# EAGLE board 16x16_multiplexed_3.2x3.2_NSEW_headers (EAGLE 6.0)
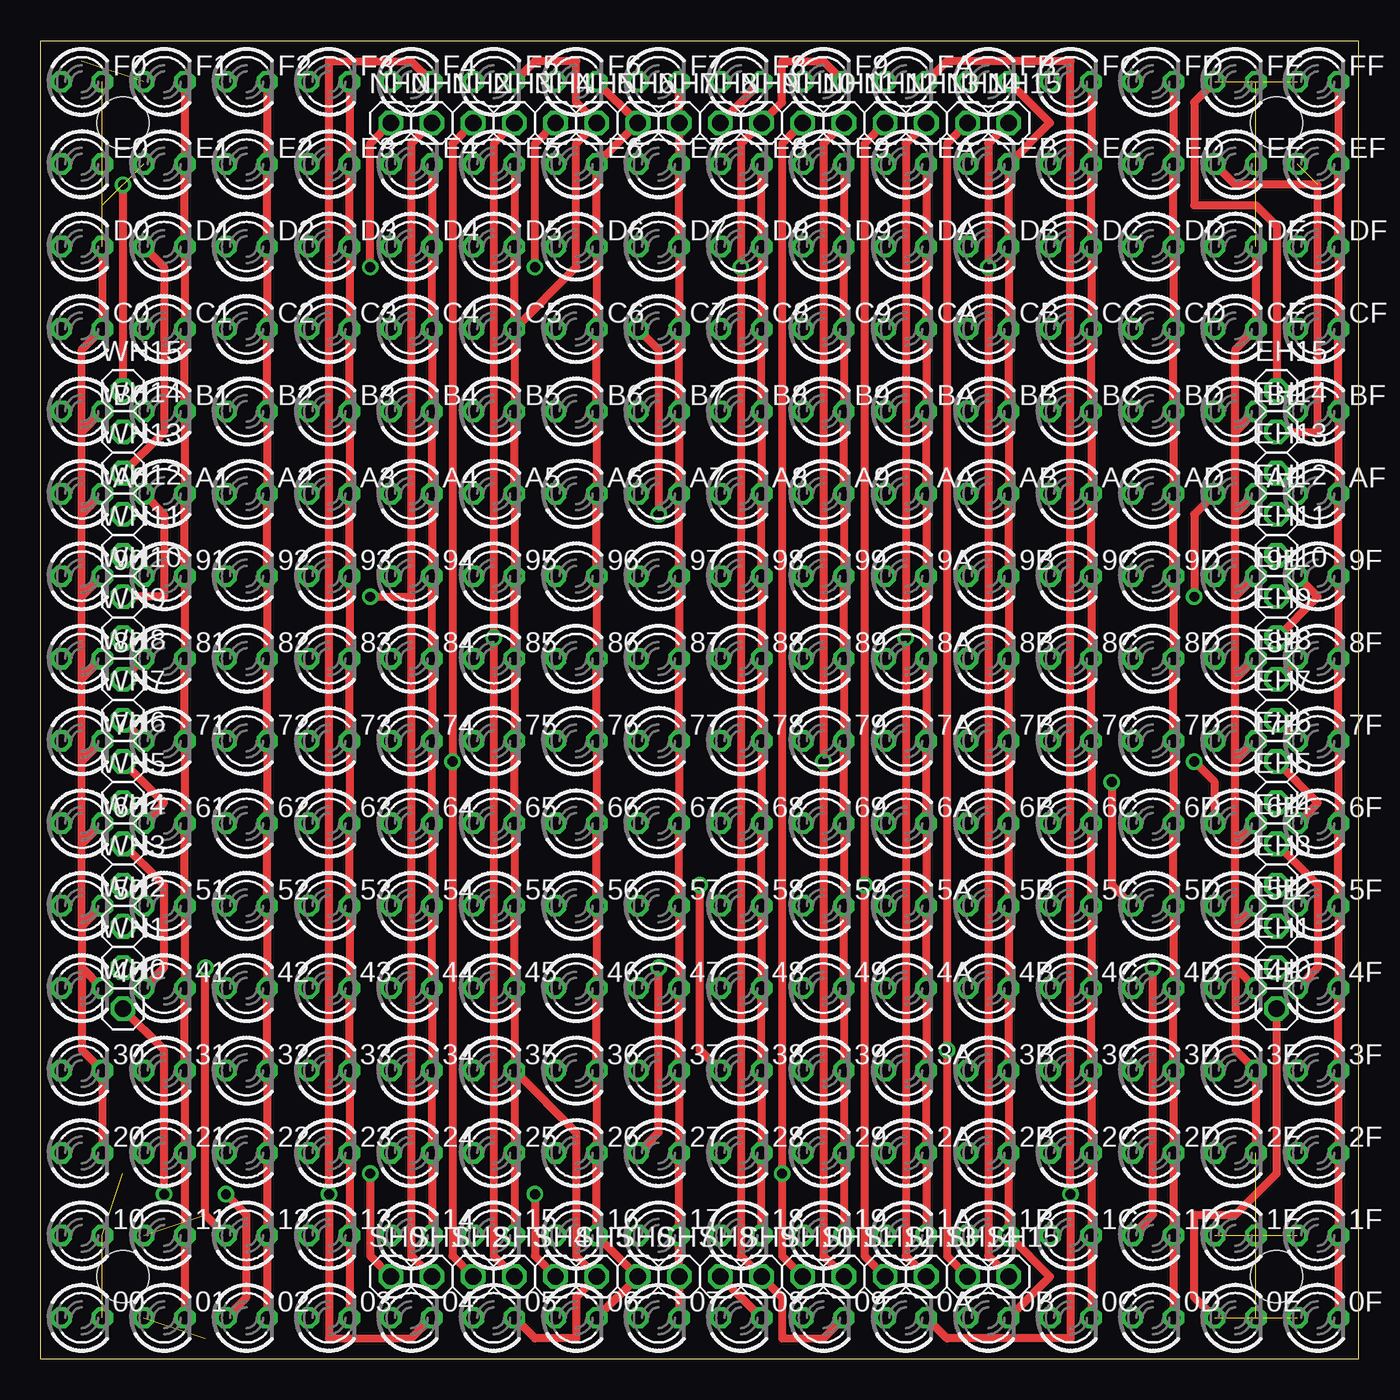
[diagram p0: board, top side]
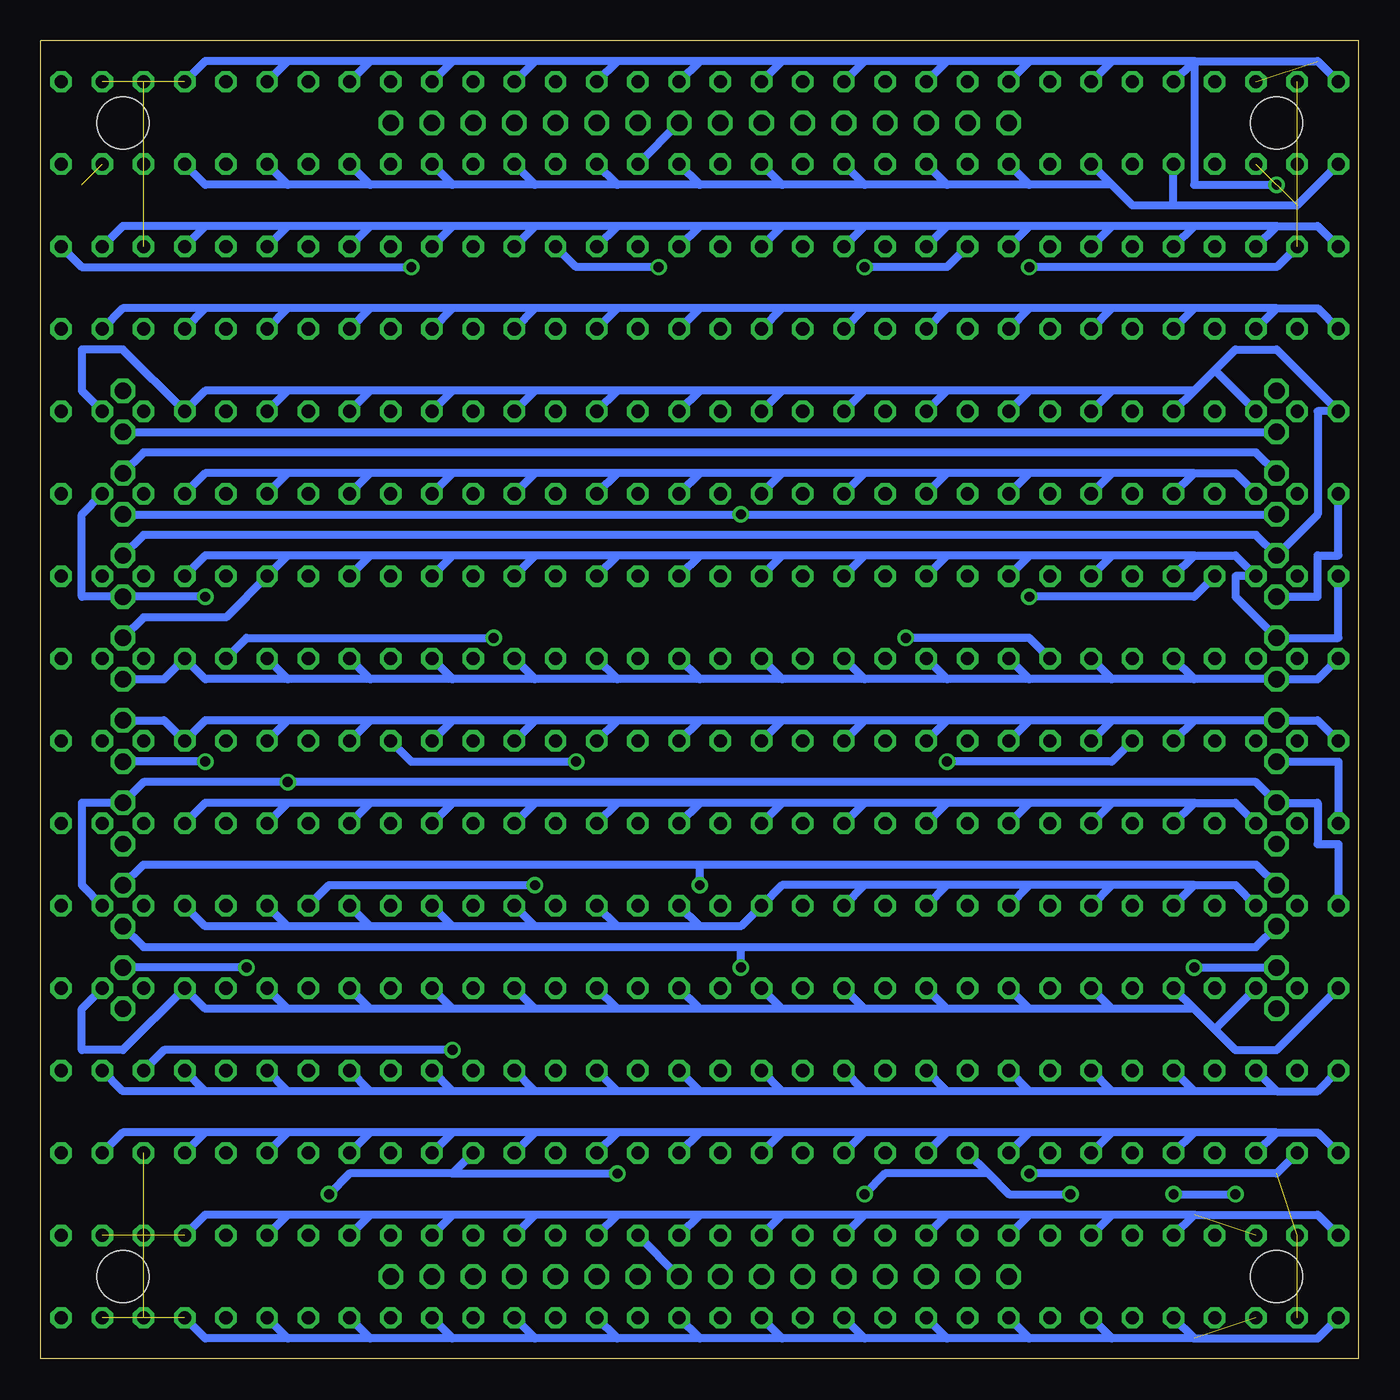
[diagram p1: board, bottom side, seen from below]

Size 81.28 x 81.28 mm. Coordinates in mm from the lower left corner, seen from the top.
Outline: 0,0 0,81.28 81.28,81.28 81.28,0 0,0
Copper layers (1*16): Top 0.035mm / dielectric 1.5mm / Bottom 0.035mm
Design rules: minimum track width 20mil, minimum drill 24mil, track to track 11mil, track to pad 11mil, pad to pad 8mil, via to via 8mil, smd to smd 8mil, copper to edge 40mil, drill to drill 8mil, minimum pad ring 10mil, minimum via ring 8mil, stop-mask expansion 4mil, vias tented up to drill 0mil, thermal gap 10mil
Holes 3.2 mm at 5.08,76.2 76.2,76.2 5.08,5.08 76.2,5.08

## Footprints (pad centres in the part's own frame; a part is rotated, then mirrored left to right if it is on the bottom)
LED3MM = drill 0.813 octagon: A -1.27,0; K 1.27,0
1X01 = drill 1.016 octagon: 1 0,0

## Placement (x,y rotation side)
00  [LED3MM]  2.54,2.54 0 top
0A  [LED3MM]  53.34,2.54 0 top
0B  [LED3MM]  58.42,2.54 0 top
0C  [LED3MM]  63.5,2.54 0 top
0D  [LED3MM]  68.58,2.54 0 top
0E  [LED3MM]  73.66,2.54 0 top
0F  [LED3MM]  78.74,2.54 0 top
01  [LED3MM]  7.62,2.54 0 top
1A  [LED3MM]  53.34,7.62 0 top
1B  [LED3MM]  58.42,7.62 0 top
1C  [LED3MM]  63.5,7.62 0 top
1D  [LED3MM]  68.58,7.62 0 top
1E  [LED3MM]  73.66,7.62 0 top
1F  [LED3MM]  78.74,7.62 0 top
02  [LED3MM]  12.7,2.54 0 top
2A  [LED3MM]  53.34,12.7 0 top
2B  [LED3MM]  58.42,12.7 0 top
2C  [LED3MM]  63.5,12.7 0 top
2D  [LED3MM]  68.58,12.7 0 top
2E  [LED3MM]  73.66,12.7 0 top
2F  [LED3MM]  78.74,12.7 0 top
03  [LED3MM]  17.78,2.54 0 top
3A  [LED3MM]  53.34,17.78 0 top
3B  [LED3MM]  58.42,17.78 0 top
3C  [LED3MM]  63.5,17.78 0 top
3D  [LED3MM]  68.58,17.78 0 top
3E  [LED3MM]  73.66,17.78 0 top
3F  [LED3MM]  78.74,17.78 0 top
04  [LED3MM]  22.86,2.54 0 top
4A  [LED3MM]  53.34,22.86 0 top
4B  [LED3MM]  58.42,22.86 0 top
4C  [LED3MM]  63.5,22.86 0 top
4D  [LED3MM]  68.58,22.86 0 top
4E  [LED3MM]  73.66,22.86 0 top
4F  [LED3MM]  78.74,22.86 0 top
05  [LED3MM]  27.94,2.54 0 top
5A  [LED3MM]  53.34,27.94 0 top
5B  [LED3MM]  58.42,27.94 0 top
5C  [LED3MM]  63.5,27.94 0 top
5D  [LED3MM]  68.58,27.94 0 top
5E  [LED3MM]  73.66,27.94 0 top
5F  [LED3MM]  78.74,27.94 0 top
06  [LED3MM]  33.02,2.54 0 top
6A  [LED3MM]  53.34,33.02 0 top
6B  [LED3MM]  58.42,33.02 0 top
6C  [LED3MM]  63.5,33.02 0 top
6D  [LED3MM]  68.58,33.02 0 top
6E  [LED3MM]  73.66,33.02 0 top
6F  [LED3MM]  78.74,33.02 0 top
07  [LED3MM]  38.1,2.54 0 top
7A  [LED3MM]  53.34,38.1 0 top
7B  [LED3MM]  58.42,38.1 0 top
7C  [LED3MM]  63.5,38.1 0 top
7D  [LED3MM]  68.58,38.1 0 top
7E  [LED3MM]  73.66,38.1 0 top
7F  [LED3MM]  78.74,38.1 0 top
08  [LED3MM]  43.18,2.54 0 top
8A  [LED3MM]  53.34,43.18 0 top
8B  [LED3MM]  58.42,43.18 0 top
8C  [LED3MM]  63.5,43.18 0 top
8D  [LED3MM]  68.58,43.18 0 top
8E  [LED3MM]  73.66,43.18 0 top
8F  [LED3MM]  78.74,43.18 0 top
09  [LED3MM]  48.26,2.54 0 top
9A  [LED3MM]  53.34,48.26 0 top
9B  [LED3MM]  58.42,48.26 0 top
9C  [LED3MM]  63.5,48.26 0 top
9D  [LED3MM]  68.58,48.26 0 top
9E  [LED3MM]  73.66,48.26 0 top
9F  [LED3MM]  78.74,48.26 0 top
10  [LED3MM]  2.54,7.62 0 top
11  [LED3MM]  7.62,7.62 0 top
12  [LED3MM]  12.7,7.62 0 top
13  [LED3MM]  17.78,7.62 0 top
14  [LED3MM]  22.86,7.62 0 top
15  [LED3MM]  27.94,7.62 0 top
16  [LED3MM]  33.02,7.62 0 top
17  [LED3MM]  38.1,7.62 0 top
18  [LED3MM]  43.18,7.62 0 top
19  [LED3MM]  48.26,7.62 0 top
20  [LED3MM]  2.54,12.7 0 top
21  [LED3MM]  7.62,12.7 0 top
22  [LED3MM]  12.7,12.7 0 top
23  [LED3MM]  17.78,12.7 0 top
24  [LED3MM]  22.86,12.7 0 top
25  [LED3MM]  27.94,12.7 0 top
26  [LED3MM]  33.02,12.7 0 top
27  [LED3MM]  38.1,12.7 0 top
28  [LED3MM]  43.18,12.7 0 top
29  [LED3MM]  48.26,12.7 0 top
30  [LED3MM]  2.54,17.78 0 top
31  [LED3MM]  7.62,17.78 0 top
32  [LED3MM]  12.7,17.78 0 top
33  [LED3MM]  17.78,17.78 0 top
34  [LED3MM]  22.86,17.78 0 top
35  [LED3MM]  27.94,17.78 0 top
36  [LED3MM]  33.02,17.78 0 top
37  [LED3MM]  38.1,17.78 0 top
38  [LED3MM]  43.18,17.78 0 top
39  [LED3MM]  48.26,17.78 0 top
40  [LED3MM]  2.54,22.86 0 top
41  [LED3MM]  7.62,22.86 0 top
42  [LED3MM]  12.7,22.86 0 top
43  [LED3MM]  17.78,22.86 0 top
44  [LED3MM]  22.86,22.86 0 top
45  [LED3MM]  27.94,22.86 0 top
46  [LED3MM]  33.02,22.86 0 top
47  [LED3MM]  38.1,22.86 0 top
48  [LED3MM]  43.18,22.86 0 top
49  [LED3MM]  48.26,22.86 0 top
50  [LED3MM]  2.54,27.94 0 top
51  [LED3MM]  7.62,27.94 0 top
52  [LED3MM]  12.7,27.94 0 top
53  [LED3MM]  17.78,27.94 0 top
54  [LED3MM]  22.86,27.94 0 top
55  [LED3MM]  27.94,27.94 0 top
56  [LED3MM]  33.02,27.94 0 top
57  [LED3MM]  38.1,27.94 0 top
58  [LED3MM]  43.18,27.94 0 top
59  [LED3MM]  48.26,27.94 0 top
60  [LED3MM]  2.54,33.02 0 top
61  [LED3MM]  7.62,33.02 0 top
62  [LED3MM]  12.7,33.02 0 top
63  [LED3MM]  17.78,33.02 0 top
64  [LED3MM]  22.86,33.02 0 top
65  [LED3MM]  27.94,33.02 0 top
66  [LED3MM]  33.02,33.02 0 top
67  [LED3MM]  38.1,33.02 0 top
68  [LED3MM]  43.18,33.02 0 top
69  [LED3MM]  48.26,33.02 0 top
70  [LED3MM]  2.54,38.1 0 top
71  [LED3MM]  7.62,38.1 0 top
72  [LED3MM]  12.7,38.1 0 top
73  [LED3MM]  17.78,38.1 0 top
74  [LED3MM]  22.86,38.1 0 top
75  [LED3MM]  27.94,38.1 0 top
76  [LED3MM]  33.02,38.1 0 top
77  [LED3MM]  38.1,38.1 0 top
78  [LED3MM]  43.18,38.1 0 top
79  [LED3MM]  48.26,38.1 0 top
80  [LED3MM]  2.54,43.18 0 top
81  [LED3MM]  7.62,43.18 0 top
82  [LED3MM]  12.7,43.18 0 top
83  [LED3MM]  17.78,43.18 0 top
84  [LED3MM]  22.86,43.18 0 top
85  [LED3MM]  27.94,43.18 0 top
86  [LED3MM]  33.02,43.18 0 top
87  [LED3MM]  38.1,43.18 0 top
88  [LED3MM]  43.18,43.18 0 top
89  [LED3MM]  48.26,43.18 0 top
90  [LED3MM]  2.54,48.26 0 top
91  [LED3MM]  7.62,48.26 0 top
92  [LED3MM]  12.7,48.26 0 top
93  [LED3MM]  17.78,48.26 0 top
94  [LED3MM]  22.86,48.26 0 top
95  [LED3MM]  27.94,48.26 0 top
96  [LED3MM]  33.02,48.26 0 top
97  [LED3MM]  38.1,48.26 0 top
98  [LED3MM]  43.18,48.26 0 top
99  [LED3MM]  48.26,48.26 0 top
A0  [LED3MM]  2.54,53.34 0 top
A1  [LED3MM]  7.62,53.34 0 top
A2  [LED3MM]  12.7,53.34 0 top
A3  [LED3MM]  17.78,53.34 0 top
A4  [LED3MM]  22.86,53.34 0 top
A5  [LED3MM]  27.94,53.34 0 top
A6  [LED3MM]  33.02,53.34 0 top
A7  [LED3MM]  38.1,53.34 0 top
A8  [LED3MM]  43.18,53.34 0 top
A9  [LED3MM]  48.26,53.34 0 top
AA  [LED3MM]  53.34,53.34 0 top
AB  [LED3MM]  58.42,53.34 0 top
AC  [LED3MM]  63.5,53.34 0 top
AD  [LED3MM]  68.58,53.34 0 top
AE  [LED3MM]  73.66,53.34 0 top
AF  [LED3MM]  78.74,53.34 0 top
B0  [LED3MM]  2.54,58.42 0 top
B1  [LED3MM]  7.62,58.42 0 top
B2  [LED3MM]  12.7,58.42 0 top
B3  [LED3MM]  17.78,58.42 0 top
B4  [LED3MM]  22.86,58.42 0 top
B5  [LED3MM]  27.94,58.42 0 top
B6  [LED3MM]  33.02,58.42 0 top
B7  [LED3MM]  38.1,58.42 0 top
B8  [LED3MM]  43.18,58.42 0 top
B9  [LED3MM]  48.26,58.42 0 top
BA  [LED3MM]  53.34,58.42 0 top
BB  [LED3MM]  58.42,58.42 0 top
BC  [LED3MM]  63.5,58.42 0 top
BD  [LED3MM]  68.58,58.42 0 top
BE  [LED3MM]  73.66,58.42 0 top
BF  [LED3MM]  78.74,58.42 0 top
C0  [LED3MM]  2.54,63.5 0 top
C1  [LED3MM]  7.62,63.5 0 top
C2  [LED3MM]  12.7,63.5 0 top
C3  [LED3MM]  17.78,63.5 0 top
C4  [LED3MM]  22.86,63.5 0 top
C5  [LED3MM]  27.94,63.5 0 top
C6  [LED3MM]  33.02,63.5 0 top
C7  [LED3MM]  38.1,63.5 0 top
C8  [LED3MM]  43.18,63.5 0 top
C9  [LED3MM]  48.26,63.5 0 top
CA  [LED3MM]  53.34,63.5 0 top
CB  [LED3MM]  58.42,63.5 0 top
CC  [LED3MM]  63.5,63.5 0 top
CD  [LED3MM]  68.58,63.5 0 top
CE  [LED3MM]  73.66,63.5 0 top
CF  [LED3MM]  78.74,63.5 0 top
D0  [LED3MM]  2.54,68.58 0 top
D1  [LED3MM]  7.62,68.58 0 top
D2  [LED3MM]  12.7,68.58 0 top
D3  [LED3MM]  17.78,68.58 0 top
D4  [LED3MM]  22.86,68.58 0 top
D5  [LED3MM]  27.94,68.58 0 top
D6  [LED3MM]  33.02,68.58 0 top
D7  [LED3MM]  38.1,68.58 0 top
D8  [LED3MM]  43.18,68.58 0 top
D9  [LED3MM]  48.26,68.58 0 top
DA  [LED3MM]  53.34,68.58 0 top
DB  [LED3MM]  58.42,68.58 0 top
DC  [LED3MM]  63.5,68.58 0 top
DD  [LED3MM]  68.58,68.58 0 top
DE  [LED3MM]  73.66,68.58 0 top
DF  [LED3MM]  78.74,68.58 0 top
E0  [LED3MM]  2.54,73.66 0 top
E1  [LED3MM]  7.62,73.66 0 top
E2  [LED3MM]  12.7,73.66 0 top
E3  [LED3MM]  17.78,73.66 0 top
E4  [LED3MM]  22.86,73.66 0 top
E5  [LED3MM]  27.94,73.66 0 top
E6  [LED3MM]  33.02,73.66 0 top
E7  [LED3MM]  38.1,73.66 0 top
E8  [LED3MM]  43.18,73.66 0 top
E9  [LED3MM]  48.26,73.66 0 top
EA  [LED3MM]  53.34,73.66 0 top
EB  [LED3MM]  58.42,73.66 0 top
EC  [LED3MM]  63.5,73.66 0 top
ED  [LED3MM]  68.58,73.66 0 top
EE  [LED3MM]  73.66,73.66 0 top
EF  [LED3MM]  78.74,73.66 0 top
EH0  [1X01]  76.2,21.59 0 top
EH1  [1X01]  76.2,24.13 0 top
EH2  [1X01]  76.2,26.67 0 top
EH3  [1X01]  76.2,29.21 0 top
EH4  [1X01]  76.2,31.75 0 top
EH5  [1X01]  76.2,34.29 0 top
EH6  [1X01]  76.2,36.83 0 top
EH7  [1X01]  76.2,39.37 0 top
EH8  [1X01]  76.2,41.91 0 top
EH9  [1X01]  76.2,44.45 0 top
EH10  [1X01]  76.2,46.99 0 top
EH11  [1X01]  76.2,49.53 0 top
EH12  [1X01]  76.2,52.07 0 top
EH13  [1X01]  76.2,54.61 0 top
EH14  [1X01]  76.2,57.15 0 top
EH15  [1X01]  76.2,59.69 0 top
F0  [LED3MM]  2.54,78.74 0 top
F1  [LED3MM]  7.62,78.74 0 top
F2  [LED3MM]  12.7,78.74 0 top
F3  [LED3MM]  17.78,78.74 0 top
F4  [LED3MM]  22.86,78.74 0 top
F5  [LED3MM]  27.94,78.74 0 top
F6  [LED3MM]  33.02,78.74 0 top
F7  [LED3MM]  38.1,78.74 0 top
F8  [LED3MM]  43.18,78.74 0 top
F9  [LED3MM]  48.26,78.74 0 top
FA  [LED3MM]  53.34,78.74 0 top
FB  [LED3MM]  58.42,78.74 0 top
FC  [LED3MM]  63.5,78.74 0 top
FD  [LED3MM]  68.58,78.74 0 top
FE  [LED3MM]  73.66,78.74 0 top
FF  [LED3MM]  78.74,78.74 0 top
NH0  [1X01]  21.59,76.2 0 top
NH1  [1X01]  24.13,76.2 0 top
NH2  [1X01]  26.67,76.2 0 top
NH3  [1X01]  29.21,76.2 0 top
NH4  [1X01]  31.75,76.2 0 top
NH5  [1X01]  34.29,76.2 0 top
NH6  [1X01]  36.83,76.2 0 top
NH7  [1X01]  39.37,76.2 0 top
NH8  [1X01]  41.91,76.2 0 top
NH9  [1X01]  44.45,76.2 0 top
NH10  [1X01]  46.99,76.2 0 top
NH11  [1X01]  49.53,76.2 0 top
NH12  [1X01]  52.07,76.2 0 top
NH13  [1X01]  54.61,76.2 0 top
NH14  [1X01]  57.15,76.2 0 top
NH15  [1X01]  59.69,76.2 0 top
SH0  [1X01]  21.59,5.08 0 top
SH1  [1X01]  24.13,5.08 0 top
SH2  [1X01]  26.67,5.08 0 top
SH3  [1X01]  29.21,5.08 0 top
SH4  [1X01]  31.75,5.08 0 top
SH5  [1X01]  34.29,5.08 0 top
SH6  [1X01]  36.83,5.08 0 top
SH7  [1X01]  39.37,5.08 0 top
SH8  [1X01]  41.91,5.08 0 top
SH9  [1X01]  44.45,5.08 0 top
SH10  [1X01]  46.99,5.08 0 top
SH11  [1X01]  49.53,5.08 0 top
SH12  [1X01]  52.07,5.08 0 top
SH13  [1X01]  54.61,5.08 0 top
SH14  [1X01]  57.15,5.08 0 top
SH15  [1X01]  59.69,5.08 0 top
WH0  [1X01]  5.08,21.59 0 top
WH1  [1X01]  5.08,24.13 0 top
WH2  [1X01]  5.08,26.67 0 top
WH3  [1X01]  5.08,29.21 0 top
WH4  [1X01]  5.08,31.75 0 top
WH5  [1X01]  5.08,34.29 0 top
WH6  [1X01]  5.08,36.83 0 top
WH7  [1X01]  5.08,39.37 0 top
WH8  [1X01]  5.08,41.91 0 top
WH9  [1X01]  5.08,44.45 0 top
WH10  [1X01]  5.08,46.99 0 top
WH11  [1X01]  5.08,49.53 0 top
WH12  [1X01]  5.08,52.07 0 top
WH13  [1X01]  5.08,54.61 0 top
WH14  [1X01]  5.08,57.15 0 top
WH15  [1X01]  5.08,59.69 0 top

## Library data of the parts
00 0A 0B 0C 0D 0E 0F 01 1A 1B 1C 1D 1E 1F 02 2A 2B 2C 2D 2E 2F 03 3A 3B 3C 3D 3E 3F 04 4A 4B 4C 4D 4E 4F 05 5A 5B 5C 5D 5E 5F 06 6A 6B 6C 6D 6E 6F 07 7A 7B 7C 7D 7E 7F 08 8A 8B 8C 8D 8E 8F 09 9A 9B 9C 9D 9E 9F 10-99 A0 A1-A9 AA AB AC AD AE AF B0 B1-B9 BA BB BC BD BE BF C0 C1-C9 CA CB CC CD CE CF D0 D1-D9 DA DB DC DD DE DF E0 E1-E9 EA EB EC ED EE EF F0 F1-F9 FA FB FC FD FE FF = led
EH0 EH1-EH15 NH0 NH1-NH15 SH0 SH1-SH15 WH0 WH1-WH15 = pinhead

## Nets
C0: 00.K 10.K 20.K 30.K 40.K 50.K 60.K 70.K 80.K 90.K A0.K B0.K C0.K D0.K E0.K F0.K NH0.1 SH0.1
C1: 01.K 11.K 21.K 31.K 41.K 51.K 61.K 71.K 81.K 91.K A1.K B1.K C1.K D1.K E1.K F1.K NH1.1 SH1.1
C2: 02.K 12.K 22.K 32.K 42.K 52.K 62.K 72.K 82.K 92.K A2.K B2.K C2.K D2.K E2.K F2.K NH2.1 SH2.1
C3: 03.K 13.K 23.K 33.K 43.K 53.K 63.K 73.K 83.K 93.K A3.K B3.K C3.K D3.K E3.K F3.K NH3.1 SH3.1
C4: 04.K 14.K 24.K 34.K 44.K 54.K 64.K 74.K 84.K 94.K A4.K B4.K C4.K D4.K E4.K F4.K NH4.1 SH4.1
C5: 05.K 15.K 25.K 35.K 45.K 55.K 65.K 75.K 85.K 95.K A5.K B5.K C5.K D5.K E5.K F5.K NH5.1 SH5.1
C6: 06.K 16.K 26.K 36.K 46.K 56.K 66.K 76.K 86.K 96.K A6.K B6.K C6.K D6.K E6.K F6.K NH6.1 SH6.1
C7: 07.K 17.K 27.K 37.K 47.K 57.K 67.K 77.K 87.K 97.K A7.K B7.K C7.K D7.K E7.K F7.K NH7.1 SH7.1
C8: 08.K 18.K 28.K 38.K 48.K 58.K 68.K 78.K 88.K 98.K A8.K B8.K C8.K D8.K E8.K F8.K NH8.1 SH8.1
C9: 09.K 19.K 29.K 39.K 49.K 59.K 69.K 79.K 89.K 99.K A9.K B9.K C9.K D9.K E9.K F9.K NH9.1 SH9.1
C10: 0A.K 1A.K 2A.K 3A.K 4A.K 5A.K 6A.K 7A.K 8A.K 9A.K AA.K BA.K CA.K DA.K EA.K FA.K NH10.1 SH10.1
C11: 0B.K 1B.K 2B.K 3B.K 4B.K 5B.K 6B.K 7B.K 8B.K 9B.K AB.K BB.K CB.K DB.K EB.K FB.K NH11.1 SH11.1
C12: 0C.K 1C.K 2C.K 3C.K 4C.K 5C.K 6C.K 7C.K 8C.K 9C.K AC.K BC.K CC.K DC.K EC.K FC.K NH12.1 SH12.1
C13: 0D.K 1D.K 2D.K 3D.K 4D.K 5D.K 6D.K 7D.K 8D.K 9D.K AD.K BD.K CD.K DD.K ED.K FD.K NH13.1 SH13.1
C14: 0E.K 1E.K 2E.K 3E.K 4E.K 5E.K 6E.K 7E.K 8E.K 9E.K AE.K BE.K CE.K DE.K EE.K FE.K NH14.1 SH14.1
C15: 0F.K 1F.K 2F.K 3F.K 4F.K 5F.K 6F.K 7F.K 8F.K 9F.K AF.K BF.K CF.K DF.K EF.K FF.K NH15.1 SH15.1
R0: 00.A 0A.A 0B.A 0C.A 0D.A 0E.A 0F.A 01.A 02.A 03.A 04.A 05.A 06.A 07.A 08.A 09.A EH0.1 WH0.1
R1: 1A.A 1B.A 1C.A 1D.A 1E.A 1F.A 10.A 11.A 12.A 13.A 14.A 15.A 16.A 17.A 18.A 19.A EH1.1 WH1.1
R2: 2A.A 2B.A 2C.A 2D.A 2E.A 2F.A 20.A 21.A 22.A 23.A 24.A 25.A 26.A 27.A 28.A 29.A EH2.1 WH2.1
R3: 3A.A 3B.A 3C.A 3D.A 3E.A 3F.A 30.A 31.A 32.A 33.A 34.A 35.A 36.A 37.A 38.A 39.A EH3.1 WH3.1
R4: 4A.A 4B.A 4C.A 4D.A 4E.A 4F.A 40.A 41.A 42.A 43.A 44.A 45.A 46.A 47.A 48.A 49.A EH4.1 WH4.1
R5: 5A.A 5B.A 5C.A 5D.A 5E.A 5F.A 50.A 51.A 52.A 53.A 54.A 55.A 56.A 57.A 58.A 59.A EH5.1 WH5.1
R6: 6A.A 6B.A 6C.A 6D.A 6E.A 6F.A 60.A 61.A 62.A 63.A 64.A 65.A 66.A 67.A 68.A 69.A EH6.1 WH6.1
R7: 7A.A 7B.A 7C.A 7D.A 7E.A 7F.A 70.A 71.A 72.A 73.A 74.A 75.A 76.A 77.A 78.A 79.A EH7.1 WH7.1
R8: 8A.A 8B.A 8C.A 8D.A 8E.A 8F.A 80.A 81.A 82.A 83.A 84.A 85.A 86.A 87.A 88.A 89.A EH8.1 WH8.1
R9: 9A.A 9B.A 9C.A 9D.A 9E.A 9F.A 90.A 91.A 92.A 93.A 94.A 95.A 96.A 97.A 98.A 99.A EH9.1 WH9.1
R10: A0.A A1.A A2.A A3.A A4.A A5.A A6.A A7.A A8.A A9.A AA.A AB.A AC.A AD.A AE.A AF.A EH10.1 WH10.1
R11: B0.A B1.A B2.A B3.A B4.A B5.A B6.A B7.A B8.A B9.A BA.A BB.A BC.A BD.A BE.A BF.A EH11.1 WH11.1
R12: C0.A C1.A C2.A C3.A C4.A C5.A C6.A C7.A C8.A C9.A CA.A CB.A CC.A CD.A CE.A CF.A EH12.1 WH12.1
R13: D0.A D1.A D2.A D3.A D4.A D5.A D6.A D7.A D8.A D9.A DA.A DB.A DC.A DD.A DE.A DF.A EH13.1 WH13.1
R14: E0.A E1.A E2.A E3.A E4.A E5.A E6.A E7.A E8.A E9.A EA.A EB.A EC.A ED.A EE.A EF.A EH14.1 WH14.1
R15: EH15.1 F0.A F1.A F2.A F3.A F4.A F5.A F6.A F7.A F8.A F9.A FA.A FB.A FC.A FD.A FE.A FF.A WH15.1

## Tracks (layer width: path | path; a pad name or v marks a point on that pad's centre or on a via)
C0  (via drill 0.61)  (4 unrouted)
  Top 0.508: D0.K C0.K 2.54,62.23 2.54,57.15 | NH0.1 20.32,74.93 v20.32,67.31 | 20.K 30.K 2.54,19.05 2.54,24.13 | SH0.1 20.32,6.35 v20.32,11.43 | 2.54,24.13 40.K | 2.54,26.67 2.54,24.13 | 50.K 2.54,26.67 | 2.54,31.75 60.K | 2.54,26.67 2.54,31.75 | 2.54,36.83 70.K | 2.54,31.75 2.54,36.83 | 2.54,41.91 80.K | 2.54,36.83 2.54,41.91 | 2.54,46.99 90.K | 2.54,41.91 2.54,46.99 | 2.54,52.07 A0.K | 2.54,46.99 2.54,52.07 | 2.54,57.15 B0.K | 2.54,52.07 2.54,57.15
  Bottom 0.508: v20.32,67.31 5.08,67.31 D0.K | v20.32,11.43 5.08,11.43 20.K
C1  (via drill 0.61)
  Top 0.508: SH1.1 22.86,6.35 22.86,46.99 | 22.86,46.99 22.86,74.93 NH1.1 | F1.K E1.K D1.K C1.K B1.K A1.K 91.K 81.K 71.K 61.K 51.K 41.K 31.K 21.K 11.K 01.K | v20.32,46.99 22.86,46.99
  Bottom 0.508: v20.32,46.99 10.16,46.99 91.K
C2  (via drill 0.61)
  Top 0.508: SH2.1 25.4,6.35 v25.4,36.83 25.4,74.93 NH2.1 | F2.K E2.K D2.K C2.K B2.K A2.K 92.K 82.K 72.K 62.K 52.K 42.K 32.K 22.K 12.K 02.K
  Bottom 0.508: v25.4,36.83 15.24,36.83 72.K
C3  (via drill 0.61)
  Top 0.508: SH3.1 27.94,6.35 v27.94,44.45 27.94,74.93 NH3.1 | F3.K E3.K D3.K C3.K B3.K A3.K 93.K 83.K 73.K 63.K 53.K 43.K 33.K 23.K 13.K 03.K
  Bottom 0.508: v27.94,44.45 20.32,44.45 83.K
C4  (via drill 0.61)
  Top 0.508: E4.K D4.K C4.K B4.K A4.K 94.K 84.K 74.K 64.K 54.K 44.K 34.K 24.K 14.K | NH4.1 30.48,74.93 v30.48,67.31 | 04.K 22.86,1.27 17.78,1.27 v17.78,10.16 17.78,80.01 22.86,80.01 F4.K | SH4.1 30.48,6.35 v30.48,10.16
  Bottom 0.508: v30.48,67.31 25.4,67.31 D4.K | v17.78,10.16 21.59,10.16 22.86,11.43 | 24.K 22.86,11.43 | v30.48,10.16 29.21,11.43 22.86,11.43
C5
  Top 0.508: F5.K 30.48,80.01 33.02,80.01 33.02,77.47 NH5.1 33.02,74.93 33.02,67.31 C5.K | 05.K 30.48,1.27 33.02,1.27 33.02,3.81 SH5.1 33.02,6.35 33.02,13.97 35.K | E5.K D5.K C5.K | C5.K B5.K A5.K 95.K 85.K 75.K 65.K 55.K 45.K 35.K | 15.K 25.K 35.K
C6
  Top 0.508: F6.K NH6.1 E6.K D6.K C6.K B6.K A6.K 96.K 86.K 76.K 66.K 56.K 46.K 36.K 26.K 16.K SH6.1 06.K
C7
  Top 0.508: F7.K NH7.1 E7.K D7.K C7.K B7.K A7.K 97.K 87.K 77.K 67.K 57.K 47.K 37.K 27.K 17.K SH7.1 07.K
C8
  Top 0.508: NH8.1 F8.K | SH8.1 08.K | 18.K 28.K 38.K 48.K 58.K 68.K 78.K 88.K 98.K A8.K B8.K C8.K D8.K E8.K
  Bottom 0.508: NH8.1 E8.K | SH8.1 18.K
C9  (via drill 0.61)
  Top 0.508: E9.K D9.K C9.K B9.K A9.K 99.K 89.K 79.K 69.K 59.K 49.K 39.K 29.K 19.K | 09.K 48.26,1.27 45.72,1.27 45.72,3.81 SH9.1 43.18,6.35 v43.18,67.31 43.18,74.93 NH9.1 45.72,77.47 45.72,80.01 48.26,80.01 F9.K
  Bottom 0.508: D9.K 48.26,67.31 v43.18,67.31
C10  (via drill 0.61)
  Top 0.508: SH10.1 45.72,6.35 v45.72,11.43 45.72,74.93 NH10.1 | EA.K DA.K CA.K BA.K AA.K 9A.K 8A.K 7A.K 6A.K 5A.K 4A.K 3A.K 2A.K 1A.K | 0A.K 55.88,1.27 63.5,1.27 v63.5,10.16 63.5,80.01 55.88,80.01 FA.K
  Bottom 0.508: v63.5,10.16 62.23,11.43 55.88,11.43 | 2A.K 55.88,11.43 | 55.88,11.43 v45.72,11.43
C11  (via drill 0.61)
  Top 0.508: SH11.1 48.26,6.35 v48.26,36.83 48.26,74.93 NH11.1 | FB.K 62.23,76.2 EB.K DB.K CB.K BB.K AB.K 9B.K 8B.K 7B.K 6B.K 5B.K 4B.K 3B.K 2B.K 1B.K 62.23,5.08 0B.K
  Bottom 0.508: v48.26,36.83 58.42,36.83 7B.K
C12  (via drill 0.61)
  Top 0.508: SH12.1 50.8,6.35 v50.8,29.21 50.8,74.93 NH12.1 | FC.K EC.K DC.K CC.K BC.K AC.K 9C.K 8C.K 7C.K 6C.K 5C.K 4C.K 3C.K 2C.K 1C.K 0C.K
  Bottom 0.508: v50.8,29.21 63.5,29.21 5C.K
C13  (via drill 0.61)
  Top 0.508: SH13.1 53.34,6.35 v53.34,44.45 53.34,74.93 NH13.1 | FD.K ED.K DD.K CD.K BD.K AD.K 9D.K 8D.K 7D.K 6D.K 5D.K 4D.K 3D.K 2D.K 1D.K 0D.K
  Bottom 0.508: v53.34,44.45 68.58,44.45 8D.K
C14  (via drill 0.61)  (4 unrouted)
  Top 0.508: DE.K CE.K 73.66,62.23 73.66,57.15 | 2E.K 3E.K 73.66,19.05 73.66,24.13 | 73.66,24.13 4E.K | 73.66,26.67 73.66,24.13 | 5E.K 73.66,26.67 | 73.66,31.75 6E.K | 73.66,26.67 73.66,31.75 | 73.66,36.83 7E.K | 73.66,31.75 73.66,36.83 | 73.66,41.91 8E.K | 73.66,36.83 73.66,41.91 | 73.66,46.99 9E.K | 73.66,41.91 73.66,46.99 | 73.66,52.07 AE.K | 73.66,46.99 73.66,52.07 | 73.66,57.15 BE.K | 73.66,52.07 73.66,57.15 | SH14.1 55.88,6.35 v55.88,19.05 55.88,74.93 NH14.1
  Bottom 0.508: 3E.K 73.66,19.05 v55.88,19.05
C15  (via drill 0.61)
  Top 0.508: SH15.1 58.42,6.35 v58.42,67.31 58.42,74.93 NH15.1 | FF.K EF.K DF.K CF.K BF.K AF.K 9F.K 8F.K 7F.K 6F.K 5F.K 4F.K 3F.K 2F.K 1F.K 0F.K
  Bottom 0.508: v58.42,67.31 78.74,67.31 DF.K
R0  (via drill 0.61)  (2 unrouted)
  Top 0.508: WH0.1 7.62,19.05 v7.62,10.16 | v11.43,10.16 12.7,8.89 12.7,3.81 02.A | EH0.1 76.2,11.43 73.66,8.89 71.12,8.89 71.12,3.81 0E.A
  Bottom 0.508: 00.A 2.54,1.27 10.16,1.27 | 02.A 10.16,1.27 | 15.24,1.27 03.A | 10.16,1.27 15.24,1.27 | 20.32,1.27 04.A | 15.24,1.27 20.32,1.27 | 25.4,1.27 05.A | 20.32,1.27 25.4,1.27 | 30.48,1.27 06.A | 25.4,1.27 30.48,1.27 | 35.56,1.27 07.A | 30.48,1.27 35.56,1.27 | 40.64,1.27 08.A | 35.56,1.27 40.64,1.27 | 45.72,1.27 09.A | 40.64,1.27 45.72,1.27 | 50.8,1.27 0A.A | 45.72,1.27 50.8,1.27 | 55.88,1.27 0B.A | 50.8,1.27 55.88,1.27 | 60.96,1.27 0C.A | 55.88,1.27 60.96,1.27 | 66.04,1.27 0D.A | 60.96,1.27 66.04,1.27 | 0E.A 71.12,1.27 66.04,1.27 | v11.43,10.16 v7.62,10.16
R1  (via drill 0.61)  (2 unrouted)
  Top 0.508: v10.16,24.13 10.16,8.89 12.A | v68.58,24.13 68.58,8.89 1D.A
  Bottom 0.508: 10.A 2.54,8.89 10.16,8.89 | 12.A 10.16,8.89 | 15.24,8.89 13.A | 10.16,8.89 15.24,8.89 | 20.32,8.89 14.A | 15.24,8.89 20.32,8.89 | 25.4,8.89 15.A | 20.32,8.89 25.4,8.89 | 30.48,8.89 16.A | 25.4,8.89 30.48,8.89 | 35.56,8.89 17.A | 30.48,8.89 35.56,8.89 | 40.64,8.89 18.A | 35.56,8.89 40.64,8.89 | 45.72,8.89 19.A | 40.64,8.89 45.72,8.89 | 50.8,8.89 1A.A | 45.72,8.89 50.8,8.89 | 55.88,8.89 1B.A | 50.8,8.89 55.88,8.89 | 60.96,8.89 1C.A | 55.88,8.89 60.96,8.89 | 66.04,8.89 1D.A | 60.96,8.89 66.04,8.89 | 1E.A 71.12,8.89 66.04,8.89 | v10.16,24.13 WH1.1 | v68.58,24.13 EH1.1
R2  (via drill 0.61)
  Top 0.508: v38.1,24.13 38.1,13.97 27.A
  Bottom 0.508: WH2.1 6.35,25.4 38.1,25.4 | 38.1,25.4 74.93,25.4 EH2.1 | 20.A 2.54,13.97 5.08,13.97 | 21.A 5.08,13.97 | 10.16,13.97 22.A | 5.08,13.97 10.16,13.97 | 15.24,13.97 23.A | 10.16,13.97 15.24,13.97 | 20.32,13.97 24.A | 15.24,13.97 20.32,13.97 | 25.4,13.97 25.A | 20.32,13.97 25.4,13.97 | 30.48,13.97 26.A | 25.4,13.97 30.48,13.97 | 35.56,13.97 27.A | 30.48,13.97 35.56,13.97 | 40.64,13.97 28.A | 35.56,13.97 40.64,13.97 | 45.72,13.97 29.A | 40.64,13.97 45.72,13.97 | 50.8,13.97 2A.A | 45.72,13.97 50.8,13.97 | 55.88,13.97 2B.A | 50.8,13.97 55.88,13.97 | 60.96,13.97 2C.A | 55.88,13.97 60.96,13.97 | 66.04,13.97 2D.A | 60.96,13.97 66.04,13.97 | 71.12,13.97 2E.A | 66.04,13.97 71.12,13.97 | 2F.A 76.2,13.97 71.12,13.97 | v38.1,24.13 38.1,25.4
R3  (via drill 0.61)
  Top 0.508: v40.64,29.21 40.64,19.05 38.A
  Bottom 0.508: WH3.1 6.35,30.48 40.64,30.48 | 40.64,30.48 74.93,30.48 EH3.1 | 30.A 2.54,16.51 5.08,16.51 | 31.A 5.08,16.51 | 10.16,16.51 32.A | 5.08,16.51 10.16,16.51 | 15.24,16.51 33.A | 10.16,16.51 15.24,16.51 | 20.32,16.51 34.A | 15.24,16.51 20.32,16.51 | 25.4,16.51 35.A | 20.32,16.51 25.4,16.51 | 30.48,16.51 36.A | 25.4,16.51 30.48,16.51 | 35.56,16.51 37.A | 30.48,16.51 35.56,16.51 | 40.64,16.51 38.A | 35.56,16.51 40.64,16.51 | 45.72,16.51 39.A | 40.64,16.51 45.72,16.51 | 50.8,16.51 3A.A | 45.72,16.51 50.8,16.51 | 55.88,16.51 3B.A | 50.8,16.51 55.88,16.51 | 60.96,16.51 3C.A | 55.88,16.51 60.96,16.51 | 66.04,16.51 3D.A | 60.96,16.51 66.04,16.51 | 71.12,16.51 3E.A | 66.04,16.51 71.12,16.51 | 3F.A 76.2,16.51 71.12,16.51 | v40.64,29.21 40.64,30.48
R4
  Top 0.508: 4F.A 78.74,24.13 78.74,29.21 EH4.1 | WH4.1 7.62,29.21 7.62,24.13 41.A
  Bottom 0.508: 40.A 5.08,19.05 7.62,19.05 8.89,20.32 | 42.A 10.16,21.59 | 10.16,21.59 8.89,20.32 | 8.89,20.32 41.A | 15.24,21.59 43.A | 10.16,21.59 15.24,21.59 | 20.32,21.59 44.A | 15.24,21.59 20.32,21.59 | 25.4,21.59 45.A | 20.32,21.59 25.4,21.59 | 30.48,21.59 46.A | 25.4,21.59 30.48,21.59 | 35.56,21.59 47.A | 30.48,21.59 35.56,21.59 | 40.64,21.59 48.A | 35.56,21.59 40.64,21.59 | 45.72,21.59 49.A | 40.64,21.59 45.72,21.59 | 50.8,21.59 4A.A | 45.72,21.59 50.8,21.59 | 55.88,21.59 4B.A | 50.8,21.59 55.88,21.59 | 60.96,21.59 4C.A | 55.88,21.59 60.96,21.59 | 66.04,21.59 4D.A | 60.96,21.59 66.04,21.59 | 66.04,21.59 71.12,21.59 4E.A 76.2,19.05 78.74,19.05 78.74,21.59 4F.A
R5  (via drill 0.61)
  Top 0.508: 5D.A 66.04,29.21 v66.04,35.56
  Bottom 0.508: 51.A 7.62,29.21 10.16,29.21 | 52.A 10.16,29.21 | 15.24,29.21 53.A | 10.16,29.21 15.24,29.21 | 20.32,29.21 54.A | 15.24,29.21 20.32,29.21 | 25.4,29.21 55.A | 20.32,29.21 25.4,29.21 | 30.48,29.21 56.A | 25.4,29.21 30.48,29.21 | 30.48,29.21 35.56,29.21 57.A 38.1,26.67 40.64,26.67 | 40.64,26.67 58.A | 45.72,26.67 59.A | 40.64,26.67 45.72,26.67 | 50.8,26.67 5A.A | 45.72,26.67 50.8,26.67 | 55.88,26.67 5B.A | 50.8,26.67 55.88,26.67 | 60.96,26.67 5C.A | 55.88,26.67 60.96,26.67 | 66.04,26.67 5D.A | 60.96,26.67 66.04,26.67 | 5E.A 71.12,26.67 66.04,26.67 | 5F.A 78.74,29.21 78.74,34.29 EH5.1 74.93,35.56 v66.04,35.56 6.35,35.56 WH5.1 2.54,34.29 2.54,31.75 1.27,31.75 50.A
R6  (via drill 0.61)
  Top 0.508: 6F.A 78.74,34.29 EH6.1 | v71.12,36.83 72.39,35.56 6E.A | WH6.1 7.62,34.29 61.A
  Bottom 0.508: 60.A 1.27,36.83 WH6.1 | 61.A 7.62,34.29 10.16,34.29 | 62.A 10.16,34.29 | 15.24,34.29 63.A | 10.16,34.29 15.24,34.29 | 20.32,34.29 64.A | 15.24,34.29 20.32,34.29 | 25.4,34.29 65.A | 20.32,34.29 25.4,34.29 | 30.48,34.29 66.A | 25.4,34.29 30.48,34.29 | 35.56,34.29 67.A | 30.48,34.29 35.56,34.29 | 40.64,34.29 68.A | 35.56,34.29 40.64,34.29 | 45.72,34.29 69.A | 40.64,34.29 45.72,34.29 | 50.8,34.29 6A.A | 45.72,34.29 50.8,34.29 | 55.88,34.29 6B.A | 50.8,34.29 55.88,34.29 | 60.96,34.29 6C.A | 55.88,34.29 60.96,34.29 | 66.04,34.29 6D.A | 60.96,34.29 66.04,34.29 | 6E.A 71.12,34.29 66.04,34.29 | v71.12,36.83 EH6.1
R7
  Top 0.508: EH7.1 7F.A | WH7.1 71.A
  Bottom 0.508: EH7.1 73.66,39.37 7E.A 71.12,39.37 66.04,39.37 | 70.A 2.54,39.37 WH7.1 10.16,39.37 | 10.16,39.37 72.A | 15.24,39.37 73.A | 10.16,39.37 15.24,39.37 | 20.32,39.37 74.A | 15.24,39.37 20.32,39.37 | 25.4,39.37 75.A | 20.32,39.37 25.4,39.37 | 30.48,39.37 76.A | 25.4,39.37 30.48,39.37 | 35.56,39.37 77.A | 30.48,39.37 35.56,39.37 | 40.64,39.37 78.A | 35.56,39.37 40.64,39.37 | 45.72,39.37 79.A | 40.64,39.37 45.72,39.37 | 50.8,39.37 7A.A | 45.72,39.37 50.8,39.37 | 55.88,39.37 7B.A | 50.8,39.37 55.88,39.37 | 60.96,39.37 7C.A | 55.88,39.37 60.96,39.37 | 66.04,39.37 7D.A | 60.96,39.37 66.04,39.37
R8
  Top 0.508: EH8.1 8F.A | WH8.1 81.A
  Bottom 0.508: EH8.1 73.66,41.91 8E.A 71.12,41.91 66.04,41.91 | 80.A 2.54,41.91 WH8.1 10.16,41.91 | 10.16,41.91 82.A | 15.24,41.91 83.A | 10.16,41.91 15.24,41.91 | 20.32,41.91 84.A | 15.24,41.91 20.32,41.91 | 25.4,41.91 85.A | 20.32,41.91 25.4,41.91 | 30.48,41.91 86.A | 25.4,41.91 30.48,41.91 | 35.56,41.91 87.A | 30.48,41.91 35.56,41.91 | 40.64,41.91 88.A | 35.56,41.91 40.64,41.91 | 45.72,41.91 89.A | 40.64,41.91 45.72,41.91 | 50.8,41.91 8A.A | 45.72,41.91 50.8,41.91 | 55.88,41.91 8B.A | 50.8,41.91 55.88,41.91 | 60.96,41.91 8C.A | 55.88,41.91 60.96,41.91 | 66.04,41.91 8D.A | 60.96,41.91 66.04,41.91
R9
  Top 0.508: 9F.A 78.74,46.99 EH9.1
  Bottom 0.508: 90.A 1.27,44.45 WH9.1 7.62,46.99 7.62,48.26 91.A 7.62,49.53 10.16,49.53 | 92.A 10.16,49.53 | 15.24,49.53 93.A | 10.16,49.53 15.24,49.53 | 20.32,49.53 94.A | 15.24,49.53 20.32,49.53 | 25.4,49.53 95.A | 20.32,49.53 25.4,49.53 | 30.48,49.53 96.A | 25.4,49.53 30.48,49.53 | 35.56,49.53 97.A | 30.48,49.53 35.56,49.53 | 40.64,49.53 98.A | 35.56,49.53 40.64,49.53 | 45.72,49.53 99.A | 40.64,49.53 45.72,49.53 | 50.8,49.53 9A.A | 45.72,49.53 50.8,49.53 | 55.88,49.53 9B.A | 50.8,49.53 55.88,49.53 | 60.96,49.53 9C.A | 55.88,49.53 60.96,49.53 | 66.04,49.53 9D.A 69.85,45.72 74.93,45.72 EH9.1 | 60.96,49.53 66.04,49.53 | 9E.A 71.12,49.53 66.04,49.53
R10  (via drill 0.61)
  Top 0.508: v71.12,46.99 71.12,52.07 AE.A | WH10.1 7.62,46.99 7.62,52.07 A1.A
  Bottom 0.508: A0.A 1.27,49.53 2.54,49.53 2.54,46.99 WH10.1 | AF.A 78.74,52.07 78.74,46.99 EH10.1 v71.12,46.99 | A1.A 7.62,54.61 10.16,54.61 | A2.A 10.16,54.61 | 15.24,54.61 A3.A | 10.16,54.61 15.24,54.61 | 20.32,54.61 A4.A | 15.24,54.61 20.32,54.61 | 25.4,54.61 A5.A | 20.32,54.61 25.4,54.61 | 30.48,54.61 A6.A | 25.4,54.61 30.48,54.61 | 35.56,54.61 A7.A | 30.48,54.61 35.56,54.61 | 40.64,54.61 A8.A | 35.56,54.61 40.64,54.61 | 45.72,54.61 A9.A | 40.64,54.61 45.72,54.61 | 50.8,54.61 AA.A | 45.72,54.61 50.8,54.61 | 55.88,54.61 AB.A | 50.8,54.61 55.88,54.61 | 60.96,54.61 AC.A | 55.88,54.61 60.96,54.61 | 66.04,54.61 AD.A | 60.96,54.61 66.04,54.61 | AE.A 71.12,54.61 66.04,54.61
R11
  Bottom 0.508: B2.A 10.16,59.69 | 10.16,59.69 8.89,60.96 | 8.89,60.96 7.62,62.23 5.08,62.23 B0.A 2.54,58.42 2.54,52.07 WH11.1 6.35,50.8 74.93,50.8 EH11.1 | 8.89,60.96 B1.A | 15.24,59.69 B3.A | 10.16,59.69 15.24,59.69 | 20.32,59.69 B4.A | 15.24,59.69 20.32,59.69 | 25.4,59.69 B5.A | 20.32,59.69 25.4,59.69 | 30.48,59.69 B6.A | 25.4,59.69 30.48,59.69 | 35.56,59.69 B7.A | 30.48,59.69 35.56,59.69 | 40.64,59.69 B8.A | 35.56,59.69 40.64,59.69 | 45.72,59.69 B9.A | 40.64,59.69 45.72,59.69 | 50.8,59.69 BA.A | 45.72,59.69 50.8,59.69 | 55.88,59.69 BB.A | 50.8,59.69 55.88,59.69 | 60.96,59.69 BC.A | 55.88,59.69 60.96,59.69 | 66.04,59.69 BD.A | 60.96,59.69 66.04,59.69 | 66.04,59.69 71.12,59.69 BE.A 76.2,62.23 78.74,62.23 78.74,59.69 BF.A
R12  (via drill 0.61)
  Top 0.508: v38.1,52.07 38.1,62.23 C7.A
  Bottom 0.508: EH12.1 v38.1,52.07 WH12.1 | C0.A 2.54,64.77 5.08,64.77 | C1.A 5.08,64.77 | 10.16,64.77 C2.A | 5.08,64.77 10.16,64.77 | 15.24,64.77 C3.A | 10.16,64.77 15.24,64.77 | 20.32,64.77 C4.A | 15.24,64.77 20.32,64.77 | 25.4,64.77 C5.A | 20.32,64.77 25.4,64.77 | 30.48,64.77 C6.A | 25.4,64.77 30.48,64.77 | 35.56,64.77 C7.A | 30.48,64.77 35.56,64.77 | 40.64,64.77 C8.A | 35.56,64.77 40.64,64.77 | 45.72,64.77 C9.A | 40.64,64.77 45.72,64.77 | 50.8,64.77 CA.A | 45.72,64.77 50.8,64.77 | 55.88,64.77 CB.A | 50.8,64.77 55.88,64.77 | 60.96,64.77 CC.A | 55.88,64.77 60.96,64.77 | 66.04,64.77 CD.A | 60.96,64.77 66.04,64.77 | 71.12,64.77 CE.A | 66.04,64.77 71.12,64.77 | CF.A 76.2,64.77 71.12,64.77
R13
  Top 0.508: WH13.1 7.62,57.15 7.62,67.31 D1.A
  Bottom 0.508: D0.A 2.54,69.85 5.08,69.85 | D1.A 5.08,69.85 | 10.16,69.85 D2.A | 5.08,69.85 10.16,69.85 | 15.24,69.85 D3.A | 10.16,69.85 15.24,69.85 | 20.32,69.85 D4.A | 15.24,69.85 20.32,69.85 | 25.4,69.85 D5.A | 20.32,69.85 25.4,69.85 | 30.48,69.85 D6.A | 25.4,69.85 30.48,69.85 | 35.56,69.85 D7.A | 30.48,69.85 35.56,69.85 | 40.64,69.85 D8.A | 35.56,69.85 40.64,69.85 | 45.72,69.85 D9.A | 40.64,69.85 45.72,69.85 | 50.8,69.85 DA.A | 45.72,69.85 50.8,69.85 | 55.88,69.85 DB.A | 50.8,69.85 55.88,69.85 | 60.96,69.85 DC.A | 55.88,69.85 60.96,69.85 | 66.04,69.85 DD.A | 60.96,69.85 66.04,69.85 | 71.12,69.85 DE.A | 66.04,69.85 71.12,69.85 | DF.A 76.2,69.85 71.12,69.85 | EH13.1 74.93,55.88 6.35,55.88 WH13.1
R14  (2 unrouted)
  Top 0.508: EE.A 73.66,72.39 78.74,72.39 78.74,57.15 EH14.1
  Bottom 0.508: E0.A 3.81,71.12 11.43,71.12 | 11.43,71.12 13.97,71.12 15.24,72.39 | E3.A 15.24,72.39 | 11.43,71.12 E2.A | 20.32,72.39 E4.A | 15.24,72.39 20.32,72.39 | 25.4,72.39 E5.A | 20.32,72.39 25.4,72.39 | 30.48,72.39 E6.A | 25.4,72.39 30.48,72.39 | 35.56,72.39 E7.A | 30.48,72.39 35.56,72.39 | 40.64,72.39 E8.A | 35.56,72.39 40.64,72.39 | 45.72,72.39 E9.A | 40.64,72.39 45.72,72.39 | 50.8,72.39 EA.A | 45.72,72.39 50.8,72.39 | 55.88,72.39 EB.A | 50.8,72.39 55.88,72.39 | 60.96,72.39 EC.A | 55.88,72.39 60.96,72.39 | 66.04,72.39 ED.A | 60.96,72.39 66.04,72.39 | EE.A 71.12,72.39 66.04,72.39 | EH14.1 WH14.1
R15  (via drill 0.61)  (2 unrouted)
  Top 0.508: v5.08,72.39 WH15.1 | EH15.1 76.2,69.85 74.93,71.12 71.12,71.12 71.12,77.47 FE.A
  Bottom 0.508: F0.A 2.54,80.01 10.16,80.01 | F2.A 10.16,80.01 | 15.24,80.01 F3.A | 10.16,80.01 15.24,80.01 | 20.32,80.01 F4.A | 15.24,80.01 20.32,80.01 | 25.4,80.01 F5.A | 20.32,80.01 25.4,80.01 | 30.48,80.01 F6.A | 25.4,80.01 30.48,80.01 | 35.56,80.01 F7.A | 30.48,80.01 35.56,80.01 | 40.64,80.01 F8.A | 35.56,80.01 40.64,80.01 | 45.72,80.01 F9.A | 40.64,80.01 45.72,80.01 | 50.8,80.01 FA.A | 45.72,80.01 50.8,80.01 | 55.88,80.01 FB.A | 50.8,80.01 55.88,80.01 | 60.96,80.01 FC.A | 55.88,80.01 60.96,80.01 | 66.04,80.01 FD.A | 60.96,80.01 66.04,80.01 | FE.A 71.12,80.01 66.04,80.01 | v5.08,72.39 10.16,72.39 10.16,80.01